# Altium PCB TK513_Limiter_old.PcbDoc
Units mm, origin at the board's own origin, x right, y up, seen from the top; angles counter-clockwise.
Board outline 50 x 50 mm, 2 copper layers (Top Layer, Bottom Layer), stack 1.671 mm thick; 27 components, 22 nets, 95 pads, 14 vias.
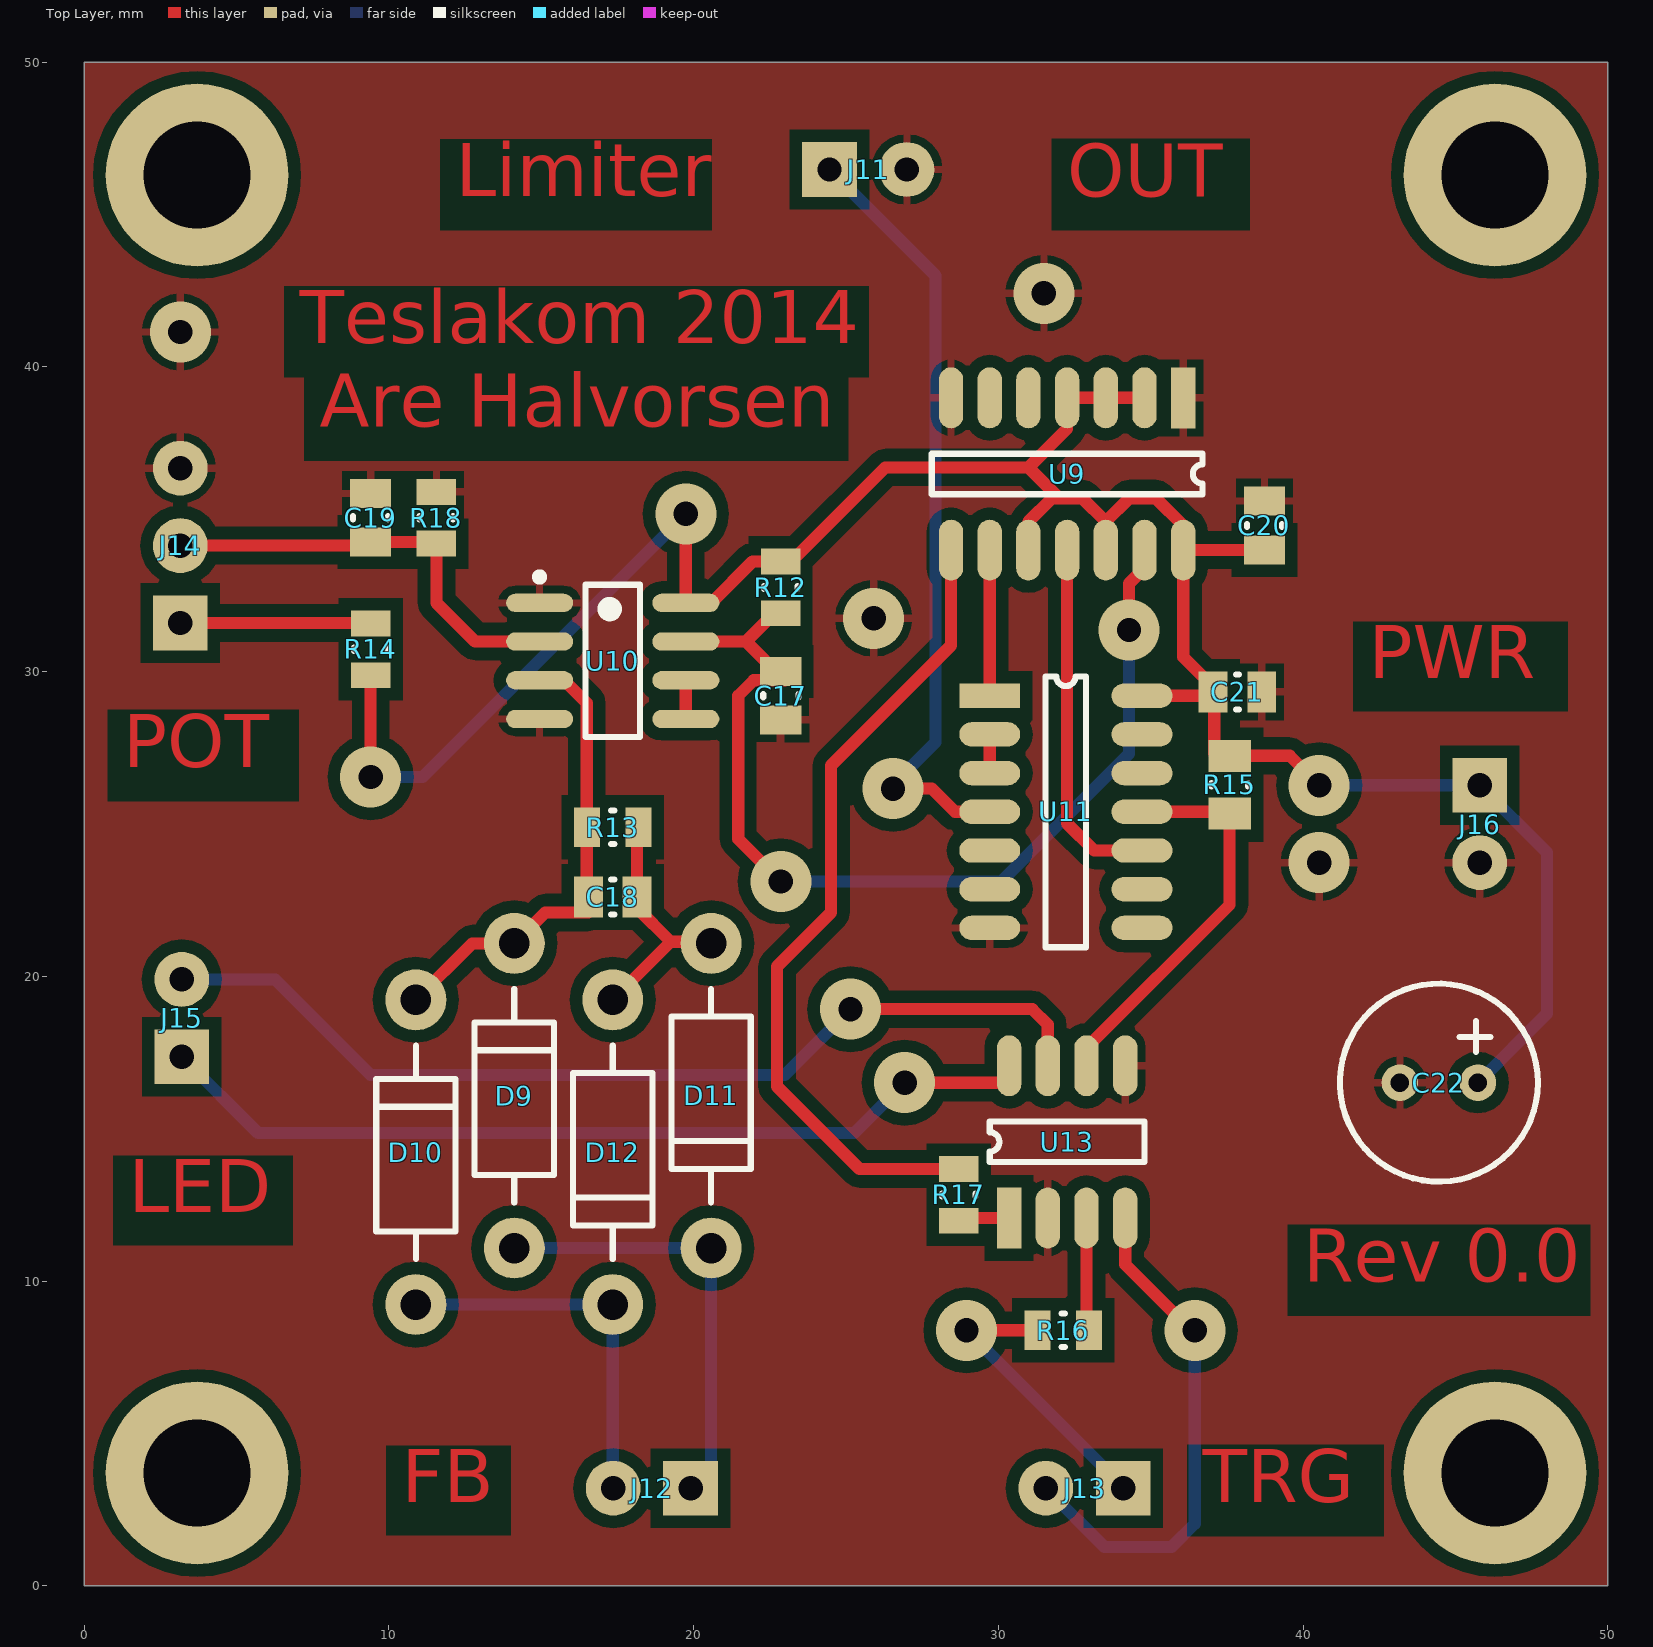
[diagram p0: Top Layer view]
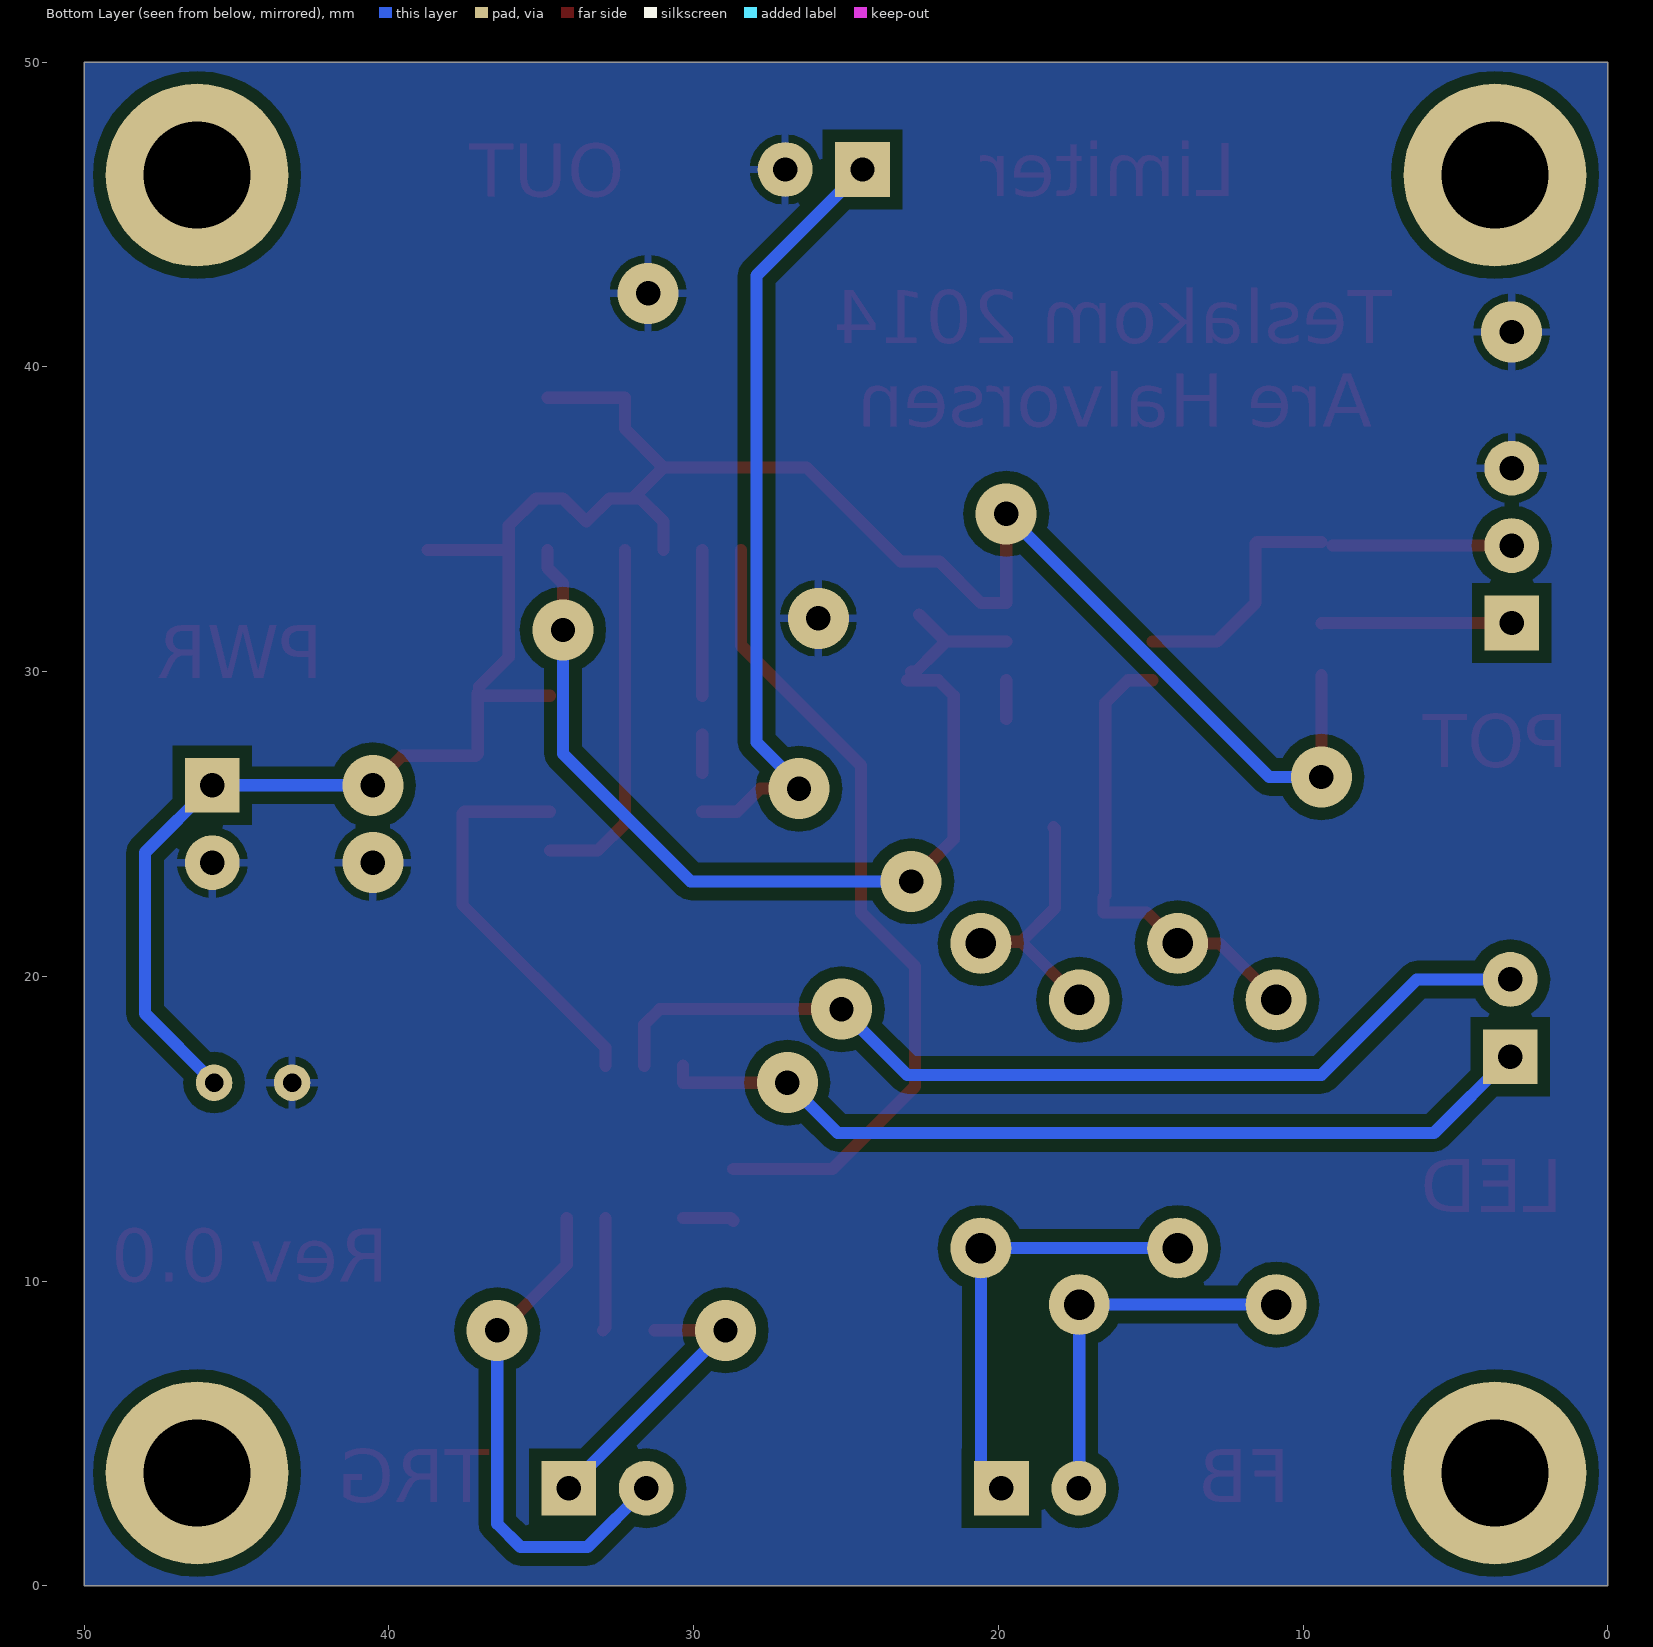
[diagram p1: Bottom Layer view, seen from below]

## Layer stack, top to bottom
Top Solder: solder mask 0.0102, Solder Resist, Dk 3.5
Top Layer: signal copper 0.0356
Dielectric1: core 1.6, FR-4, Dk 4.8
Bottom Layer: signal copper 0.0356
Bottom Solder: solder mask 0.0102, Solder Resist, Dk 3.5

## Board outline
0,0 50,0 50,50 0,50

## Design rules (kind name [scope] priority, off if disabled: settings)
Clearance Clearance_Text [IsText] p1: gap=0
Clearance Clearance_Poly [All vs InPolygon] p2: gap=0.4
Clearance [All] p3: gap=0.25
HoleSize [All] p1: absolutevalues=TRUE maxlimit=5 minlimit=0.025 maxpercent=80.000 minpercent=20.000
PolygonConnect [All] p1: connectstyle=Relief reliefconductorwidth=0.254 reliefentries=4 polygonreliefangle="90 Angle" airgapwidth=0.254
RoutingVias [All] p1: holewidth=0.711 width=1.27 viastyle="Through Hole" minholewidth=0.711 minwidth=1.27 maxholewidth=0.711 maxwidth=1.27
SolderMaskExpansion [All] p1: expansion=0.102
UnpouredPolygon [All] p1: allowunpoured=FALSE
Width [All] p1: maxlimit=2 minlimit=0.3 preferedwidth=0.4
28 further rules are at their usual default settings.

## Components (designator, comment, footprint, x,y, rotation, side; value= is the part's Value field where it differs from the comment)
C17 "1n" CAPC0805(2012)100_L 22.86,29.21 r90 top
C18 "1n" CAPC0805(2012)100_L 17.343,22.606 r180 top
C19 "100nF" CAPC0805(2012)100_L 9.398,35.052 r270 top
C20 "100nF" CAPC0805(2012)100_L 38.735,34.798 r270 top
C21 "100nF" CAPC0805(2012)100_L 37.846,29.337 r180 top
C22 "CAP" "CAP 2.5mm" 43.18,16.51 r0 top
D9 "1N5819" 1N5819 14.112,11.082 r90 top
D10 "1N5819" 1N5819 10.881,9.228 r90 top
D11 "1N5819" 1N5819 20.574,21.082 r270 top
D12 "1N5819" 1N5819 17.343,19.228 r270 top
J11 "JST 2pin" "JST 2PIN" 25.728,46.482 r270 top
J12 "JST 2pin" "JST 2PIN" 18.628,3.2 r90 top
J13 "JST 2pin" "JST 2PIN" 32.828,3.2 r90 top
J14 "JST 3pin" "JST 3PIN" 3.15,34.138 r0 top
J15 "JST 2pin" "JST 2PIN" 3.2,18.628 r0 top
J16 "JST 2pin" "JST 2pin" 45.8,25 r180 top
R12 "1K" RESC0805(2012)_L 22.86,32.766 r270 top
R13 "10R" RESC0805(2012)_L 17.343,24.892 r0 top
R14 "1K" RESC0805(2012)_L 9.398,30.734 r90 top
R15 "1K 5% 0805(2012)" RESC0805(2012)_N 37.592,26.289 r90 top
R16 "330R 5% 0805(2012)" RESC0805(2012)_L 32.131,8.382 r180 top
R17 "330R 5% 0805(2012)" RESC0805(2012)_L 28.702,12.827 r90 top
R18 "10R" RESC0805(2012)_L 11.557,35.052 r90 top
U9 "74HC74" SOP14 36.068,38.989 r270 top
U10 "LM311" SOIC8-WIDE 17.343,30.353 r0 top
U11 "74HC14" SOP14 29.718,29.21 r0 top
U13 "MOCD207R2M" SOP8 30.353,12.065 r90 top

## Footprints (in the part's own frame and the unit in brackets; to place one, negate y for a bottom-side part, rotate by r counter-clockwise, add the part's x,y. Pads: shape width x height; smd on the part's side, far side on the other; paste and mask are expansions set on the pad)
1N5819 [mm]
  round 2 hole 1: A(0,0) K(10,0)
  silkscreen extent 1.5,-1.3 8.5,1.3, body extent -0.51,-1.36 10.51,1.36, height 2.72
"CAP 2.5mm" [mm]
  round 1.2 hole 0.6: 1(0,0) 2(2.56,0)
  silkscreen extent -1.97,-3.25 4.53,3.25
CAPC0805(2012)100_L [mm] "Chip Capacitor, Body 2.0x1.2mm, Height 1.0mm, IPC High Density"
  rect 0.95x1.35 smd: 1(-0.8,0) 2(0.8,0)
  silkscreen extent -0.05,-0.58 0.05,0.58, body extent -1.1,-0.72 1.1,0.72, height 1
"JST 2PIN" [mm]
  rect 1.8x1.8 hole 0.8: 1(0,-1.27)
  round 1.8 hole 0.8: 2(0,1.27)
  body extent -2.37,-3.7 3.38,3.7, height 7
"JST 2pin" [mm]
  rect 1.8x1.8 hole 0.8: 1(0,-1.27)
  round 1.8 hole 0.8: 2(0,1.27)
  body extent -2.37,-3.7 3.38,3.7, height 7
"JST 3PIN" [mm]
  rect 1.8x1.8 hole 0.8: 1(0,-2.54)
  round 1.8 hole 0.8: 2(0,0) 3(0,2.54)
  body extent -2.35,-4.95 3.4,4.95, height 7
RESC0805(2012)_L [mm] "Chip Resistor, Body 2.0x1.3mm, IPC High Density"
  rect 0.85x1.3 smd: 1(-0.85,0) 2(0.85,0)
  silkscreen extent -0.05,-0.55 0.05,0.55, body extent -1.1,-0.67 1.1,0.68, height 0.7
RESC0805(2012)_N [mm] "Chip Resistor, Body 2.0x1.3mm, IPC Medium Density"
  rect 1.05x1.4 smd: 1(-0.95,0) 2(0.95,0)
  silkscreen extent -0.05,-0.6 0.05,0.6, body extent -1.1,-0.67 1.1,0.68, height 0.7
SOIC8-WIDE [mm] "SOIC, 8-Leads, Body 4.9x3.9mm, Pitch 1.27mm, IPC Medium Density"
  oval 2.2x0.6 smd: 1(-2.4,1.905) 2(-2.4,0.635) 3(-2.4,-0.635) 4(-2.4,-1.905) 5(2.4,-1.905) 6(2.4,-0.635) 7(2.4,0.635) 8(2.4,1.905)
  silkscreen extent -2.52,-2.5 0.9,2.88, body extent -3,-2.5 3.2,2.5, height 1.75
SOP8 [mm]
  rect 2x0.8 smd: 1(0,0)
  oval 2x0.8 smd: 2(0,-1.27) 3(0,-2.54) 4(0,-3.81) 5(5,-3.81) 6(5,-2.54) 7(5,-1.27) 8(5,0)
  silkscreen extent 1.84,-4.44 3.17,0.64, body extent -0.6,-4.4 5.6,0.6, height 1.75
SOP14 [mm]
  rect 2x0.8 smd: 1(0,0)
  oval 2x0.8 smd: 2(0,-1.27) 3(0,-2.54) 4(0,-3.81) 5(0,-5.08) 6(0,-6.35) 7(0,-7.62) 8(5,-7.62) 9(5,-6.35) 10(5,-5.08) 11(5,-3.81) 12(5,-2.54) 13(5,-1.27) 14(5,0)
  silkscreen extent 1.84,-8.25 3.17,0.64

## Part data
C17 C18 C19 C20 C21: library part CMP-1036-04418-1, "CAP 100nF 50V ±5% 0805 (2012 Metric) Thickness 1mm SMD"
R12 R13 R14 R16 R17 R18: library part CMP-1013-00062-1, "330R 0.125W 5% 0805 (2012 Metric)  SMD"
R15: library part CMP-1013-00074-1, "1K 0.125W 5% 0805 (2012 Metric)  SMD"

## Free pads (board coordinates)
  round 6 hole 3.5: 0(3.7,3.7) 0(3.7,46.3) 0(46.3,46.3) 0(46.3,3.7)

## Via types
v1: diameter 2, hole 0.8, Top Layer to Bottom Layer, 14 vias

## Nets (pads, with @x,y where several pads share a name; then routed paths per layer and width w, separated by ;. In a path a pad name is that pad's centre, name@x,y a point inside that pad or via, vN(x,y) a via of type N, cw(c..) or ccw(c..) an arc to the next point about the centre after c; other vN are vias at no path point)
+5V: C20.2 C21.2 C22.2 J16.1 R12.1 R14.1 R15.2 U9.2 U9.3 U9.4 U9.10 U9.12 U9.14 U10.8 U11.14 | length 81.1
  Top Layer w0.4: v1(9.398,26.543) R14.1 ; v1(19.743,35.179) U10.8 20.574,32.258 21.932,33.616 R12.1 23.202,33.616 26.289,36.703 30.988,36.703 ; U9.10 30.988,34.925 31.75,35.687 32.004,35.687 ; U11.14 36.919,29.21 C21.2 ; U9.2 U9.3 U9.4 32.258,37.973 30.988,36.703 ; C20.2 38.726,33.989 U9.14 ; v1(40.532,26.27) 39.563,27.239 R15.2 37.15,27.239 37.084,27.305 37.084,29.299 C21.2 ; 30.988,36.703 32.004,35.687 ; 32.004,35.687 32.766,35.687 33.528,34.925 34.29,35.687 35.179,35.687 36.068,34.798 U9.14 ; U9.14 36.068,30.48 37.046,29.502 C21.2
  Bottom Layer w0.4: v1(9.398,26.543) 11.107,26.543 v1(19.743,35.179) ; v1(40.532,26.27) J16.1 48.006,24.064 48.006,18.776 C22.2
DC_IN: C18.2 D9.K D10.K R13.1 U10.3 | length 15.6
  Top Layer w0.4: D10.K 12.736,21.082 D9.K 15.128,22.098 16.543,22.098 C18.2 16.493,22.656 R13.1 16.493,28.973 15.748,29.718 U10.3
GND: C17.1 C19.1 C20.1 C21.1 C22.1 J11.2 J14.3 J16.2 R18.2 U9.1 U9.7 U10.1 U10.4 U11.7 U13.2 U13.5
  other v1: 40.532,23.73 25.908,31.75 3.15,41.148 31.496,42.418
LED: R17.2 U9.8 | length 27.1
  Top Layer w0.4: U9.8 28.448,30.859 24.511,26.922 24.511,22.098 22.733,20.32 22.733,16.383 25.439,13.677 R17.2
LIMITER_OUT: J11.1 U11.4 | length 26.7
  Top Layer w0.4: v1(26.543,26.162) 27.813,26.162 28.575,25.4 U11.4
  Bottom Layer w0.4: J11.1 27.94,43 27.94,27.684 26.86,26.604 v1@26.86,25.845 ; v1@26.543,25.527 v1(26.543,26.162)
NetC17_2: C17.2 R12.2 U9.13 U10.7 | length 33.7
  Top Layer w0.4: U10.7 21.717,30.988 ; R12.2@22.606,31.877 21.717,30.988 ; C17.2@22.695,30.01 C17.2 ; v1(22.86,23.114) 21.463,24.511 21.463,29.21 21.971,29.718 22.987,29.718 21.717,30.988 ; v1(34.29,31.369) 34.29,32.893 34.798,33.401 U9.13
  Bottom Layer w0.4: v1(22.86,23.114) 30.099,23.114 34.29,27.305 v1(34.29,31.369)
NetC18_1: C18.1 D11.A D12.A R13.2 | length 8.3
  Top Layer w0.4: D12.A 19.251,21.135 ; R13.2 18.143,24.842 C18.1 18.143,22.243 19.251,21.135 ; D11.A 20.521,21.135 19.251,21.135
NetD9_A: D9.A D11.K J12.1 | length 14.6
  Bottom Layer w0.4: D9.A D11.K 20.574,3.876 J12.1
NetD10_A: D10.A D12.K J12.2 | length 12.5
  Bottom Layer w0.4: D10.A D12.K 17.343,3.215 J12.2
NetJ13_1: J13.1 R16.2 | length 9.7
  Top Layer w0.4: v1(28.956,8.382) R16.2 ; J13.1 J13.1@34.163,3.265
  Bottom Layer w0.4: v1(28.956,8.382) 34.098,3.24 J13.1
NetJ13_2: J13.2 U13.4 | length 17.1
  Top Layer w0.4: U13.4 34.163,10.541 36.322,8.382 v1(36.449,8.382)
  Bottom Layer w0.4: J13.2 33.488,1.27 35.687,1.27 36.449,2.032 v1(36.449,8.382)
NetJ14_1: J14.1 R14.2 | length 6.3
  Top Layer w0.4: J14.1 9.384,31.598 R14.2
NetJ15_1: J15.1 U13.8 | length 29.4
  Top Layer w0.4: v1(26.924,16.51) 30.353,16.51 U13.8
  Bottom Layer w0.4: J15.1 5.699,14.859 25.273,14.859 v1(26.924,16.51)
NetJ15_2: J15.2 U13.7 | length 32.2
  Top Layer w0.4: v1(25.146,18.923) 31.115,18.923 31.623,18.415 U13.7
  Bottom Layer w0.4: J15.2 6.264,19.898 9.398,16.764 22.987,16.764 v1(25.146,18.923)
NetR15_1: R15.1 U11.11 U13.6 | length 13.1
  Top Layer w0.4: U13.6 32.893,17.653 37.592,22.352 R15.1 37.531,25.4 U11.11
NetR16_1: R16.1 U13.3 | length 3.7
  Top Layer w0.4: U13.3 32.893,8.47 R16.1
NetR17_1: R17.1 U13.1 | length 1.7
  Top Layer w0.4: R17.1 28.79,12.065 U13.1
NetU9_9: U9.9 U11.1 | length 4.8
  Top Layer w0.4: U11.1 U9.9
NetU9_11: U9.11 U11.10 | length 11.8
  Top Layer w0.4: U9.11 32.258,25.019 33.147,24.13 U11.10
NetU10_5: U10.5 U10.6 | length 1.3
  Top Layer w0.4: U10.5 U10.6
NetU11_2: U11.2 U11.3 | length 1.3
  Top Layer w0.4: U11.3 U11.2
POT: C19.2 J14.2 R18.1 U10.2 | length 13.9
  Top Layer w0.4: J14.2 C19.2@9.03,34.138 ; C19.2 11.507,34.252 R18.1 11.557,32.258 12.827,30.988 U10.2
pads on no net: U9.5 U9.6 U11.5 U11.6 U11.8 U11.9 U11.12 U11.13

## Polygon pours and split planes (outlines as drawn)
GND on Top Layer "Bottom Layer-No Net" (solid, remove dead copper, pour order 2): 0,0 50,0 50,50 0,50
GND on Bottom Layer "Bottom Layer-No Net" (solid, remove dead copper, pour order 4): 0,0 50,0 50,50 0,50

## Other copper
Top Layer:
  pour cut-out: 10.033,36.576 10.795,36.576 10.795,35.433 12.446,35.433 12.446,34.798 10.033,34.798
  pour cut-out: 23.935,30.856 23.91,30.881 23.91,31.423 22.425,31.423 22.352,31.496 22.352,30.607
  text "Limiter" at 12.192,45.036 h3
  text "OUT" at 32.258,45.021 h3
  text "Teslakom 2014" at 7.069,40.202 h3
  text "Are Halvorsen" at 7.733,37.465 h3
  text "PWR" at 42.164,29.21 h3
  text "POT" at 1.27,26.289 h3
  text "LED" at 1.455,11.684 h3
  text "Rev 0.0" at 40.005,9.398 h3
  text "FB" at 10.414,2.159 h3
  text "TRG" at 36.703,2.159 h3

## Silkscreen, mask and mechanical layers (free items; w line width, h text height)
Mechanical 1:
  the board outline again, w0.254